# Altium PCB E20XXEDGEPCB_A.PcbDoc
Units mil, origin at the board's own origin, x right, y up, seen from the top; angles counter-clockwise.
Board outline 4250 x 3500 mil, 2 copper layers (Top Layer, Bottom Layer); 25 components, 22 nets, 108 pads, 3 vias.
Unrouted connection lines stored in the file: 2.
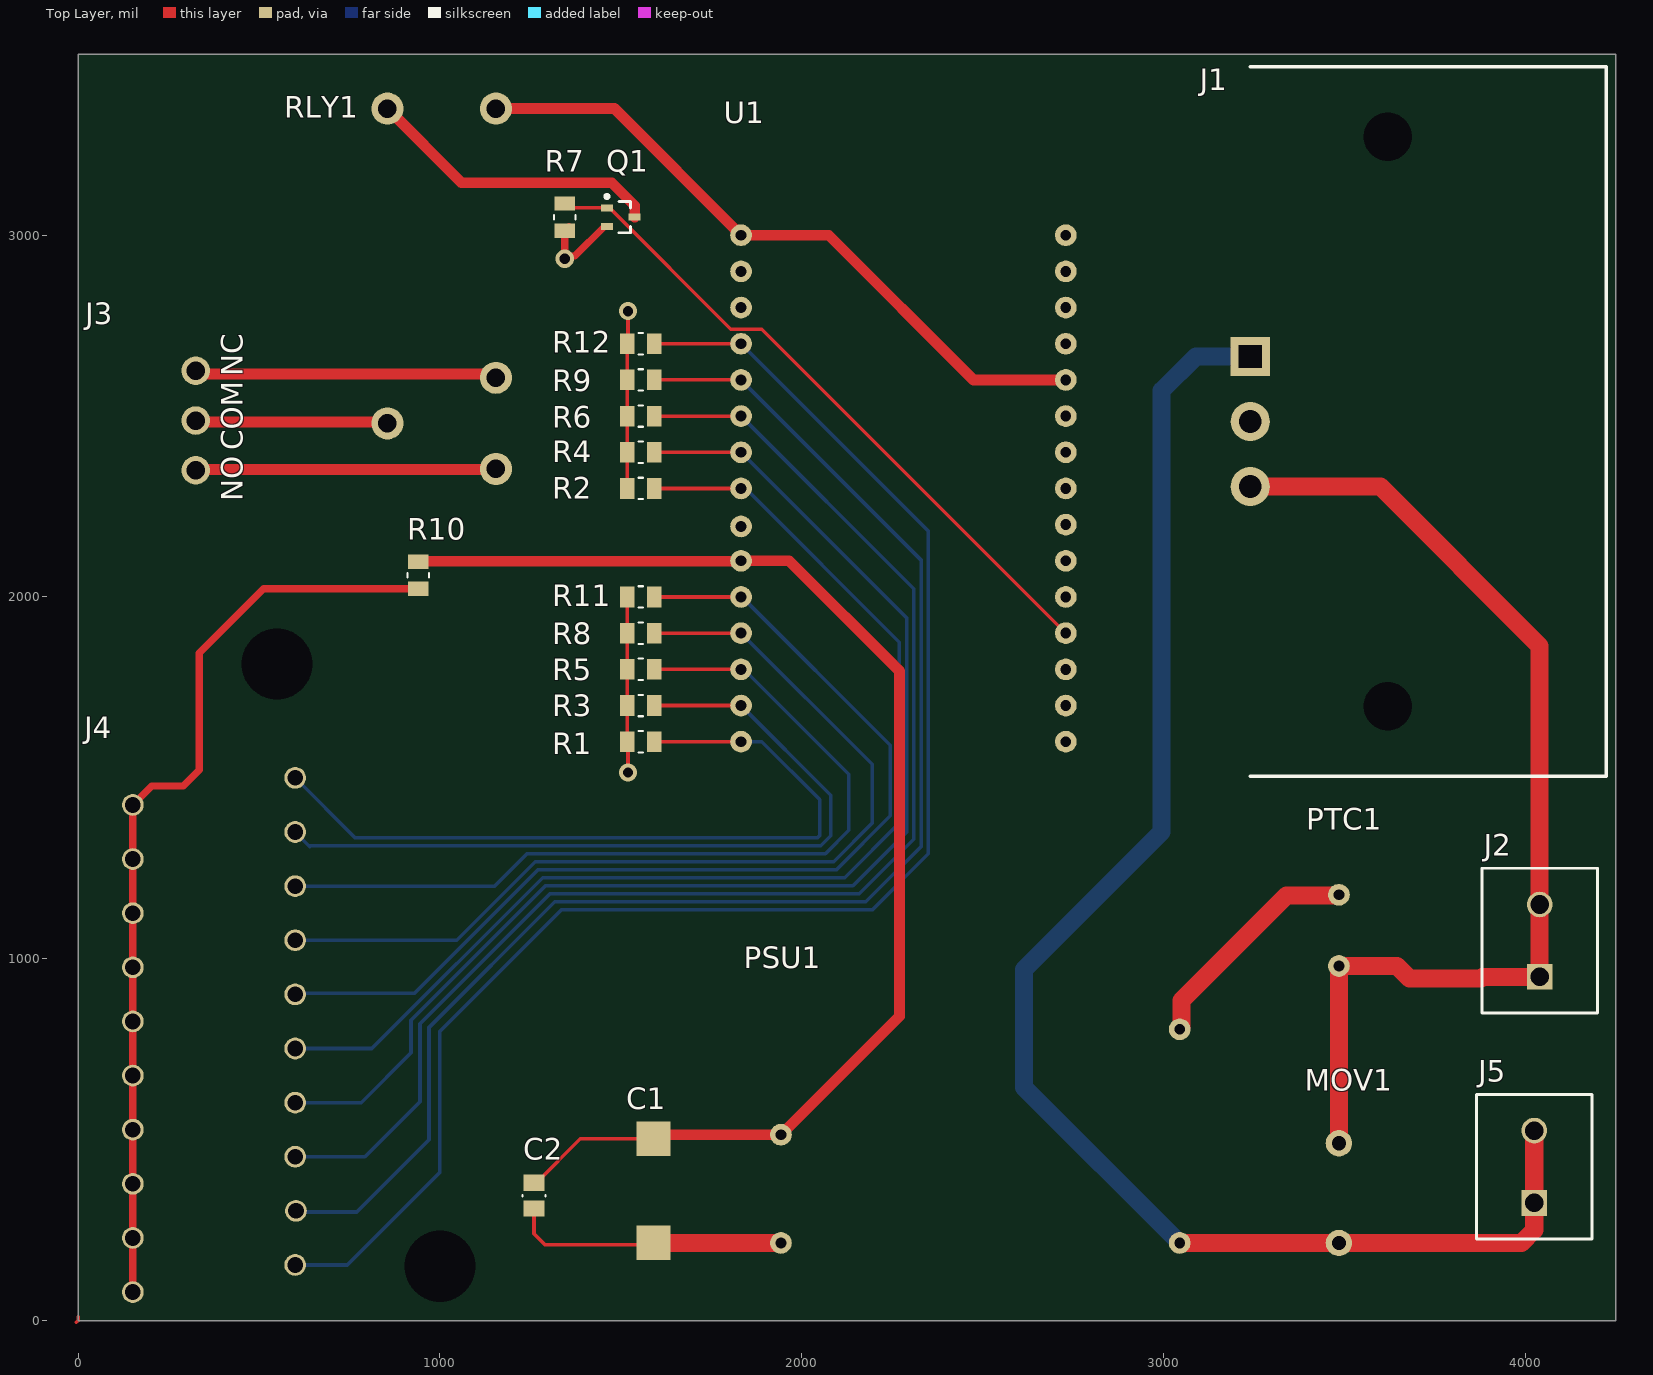
[diagram p0: Top Layer view]
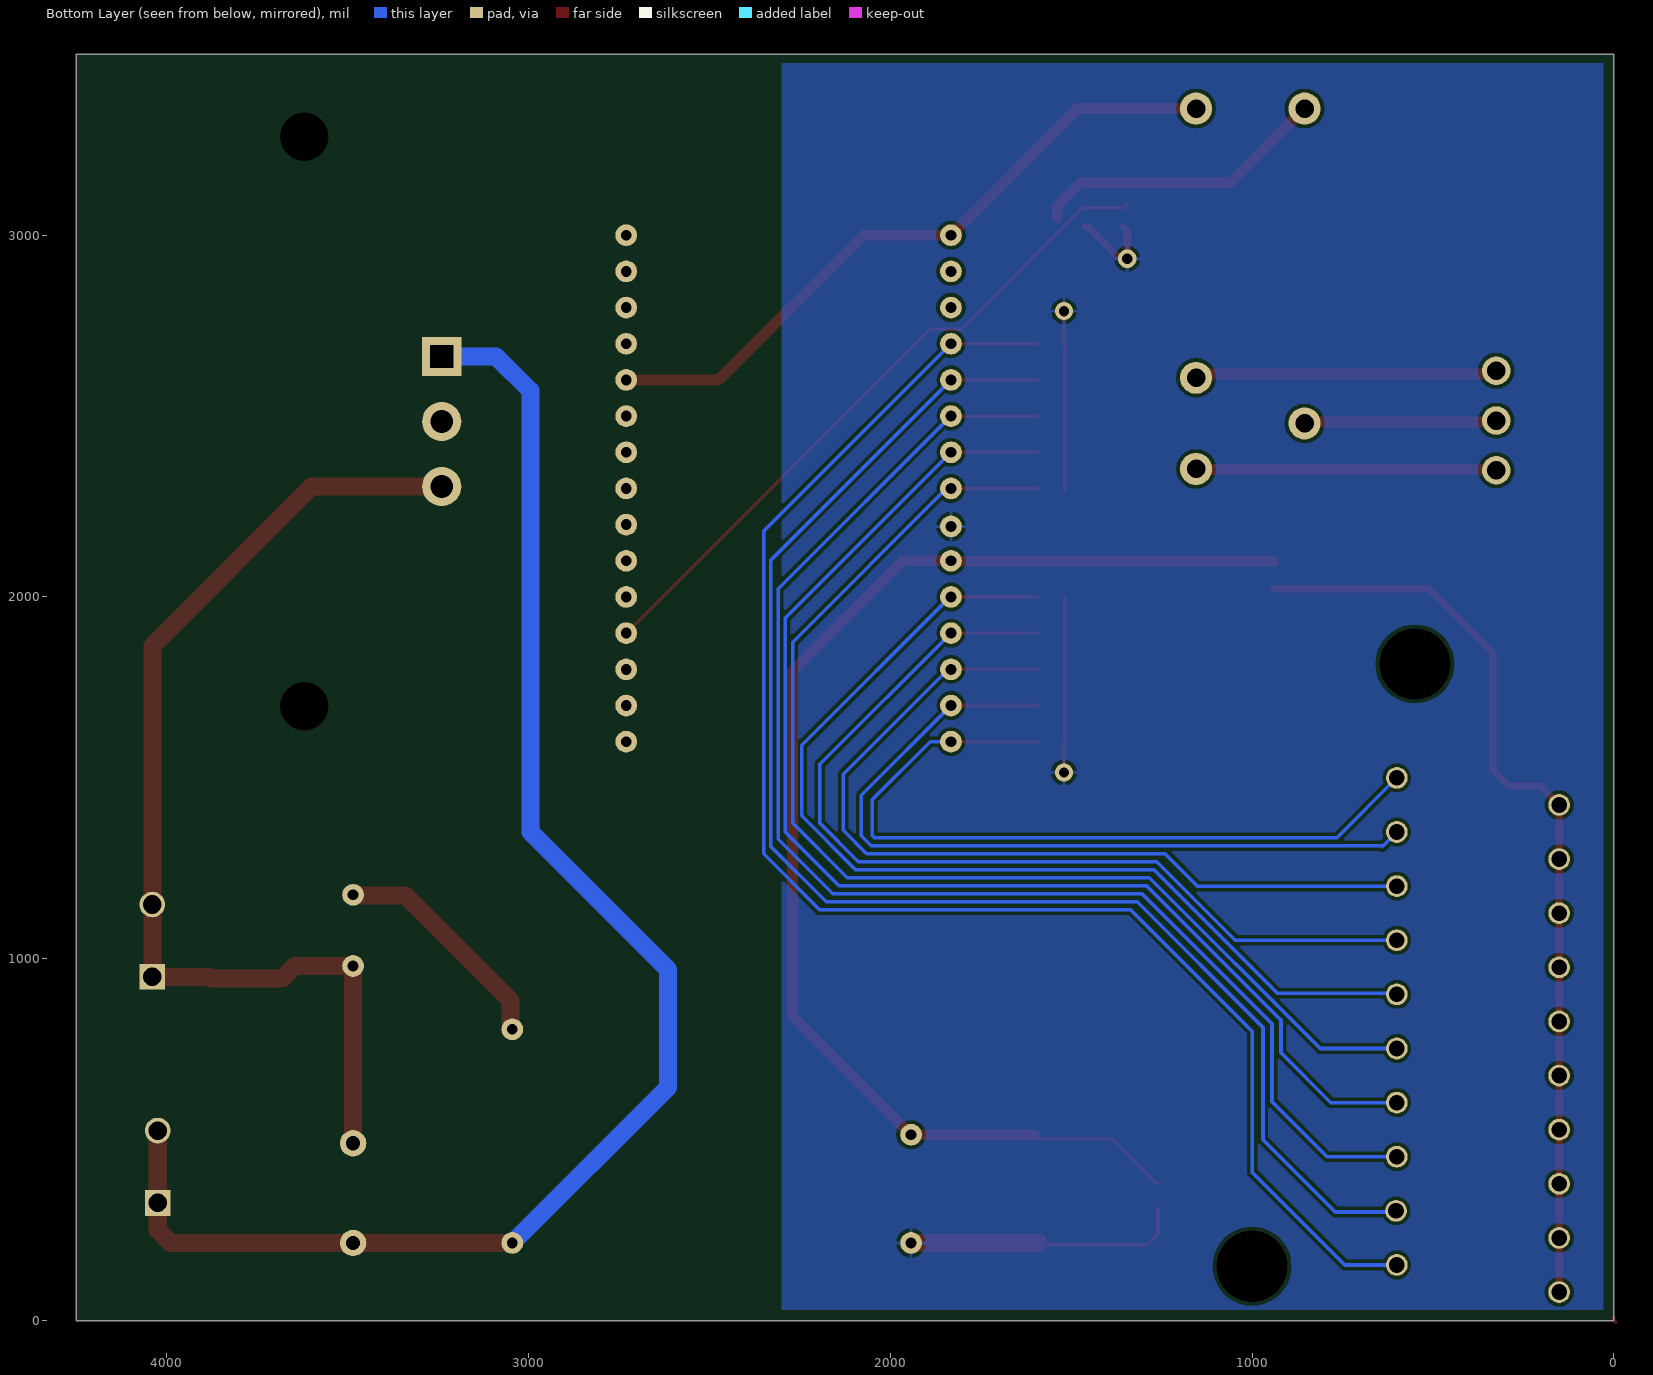
[diagram p1: Bottom Layer view, seen from below]
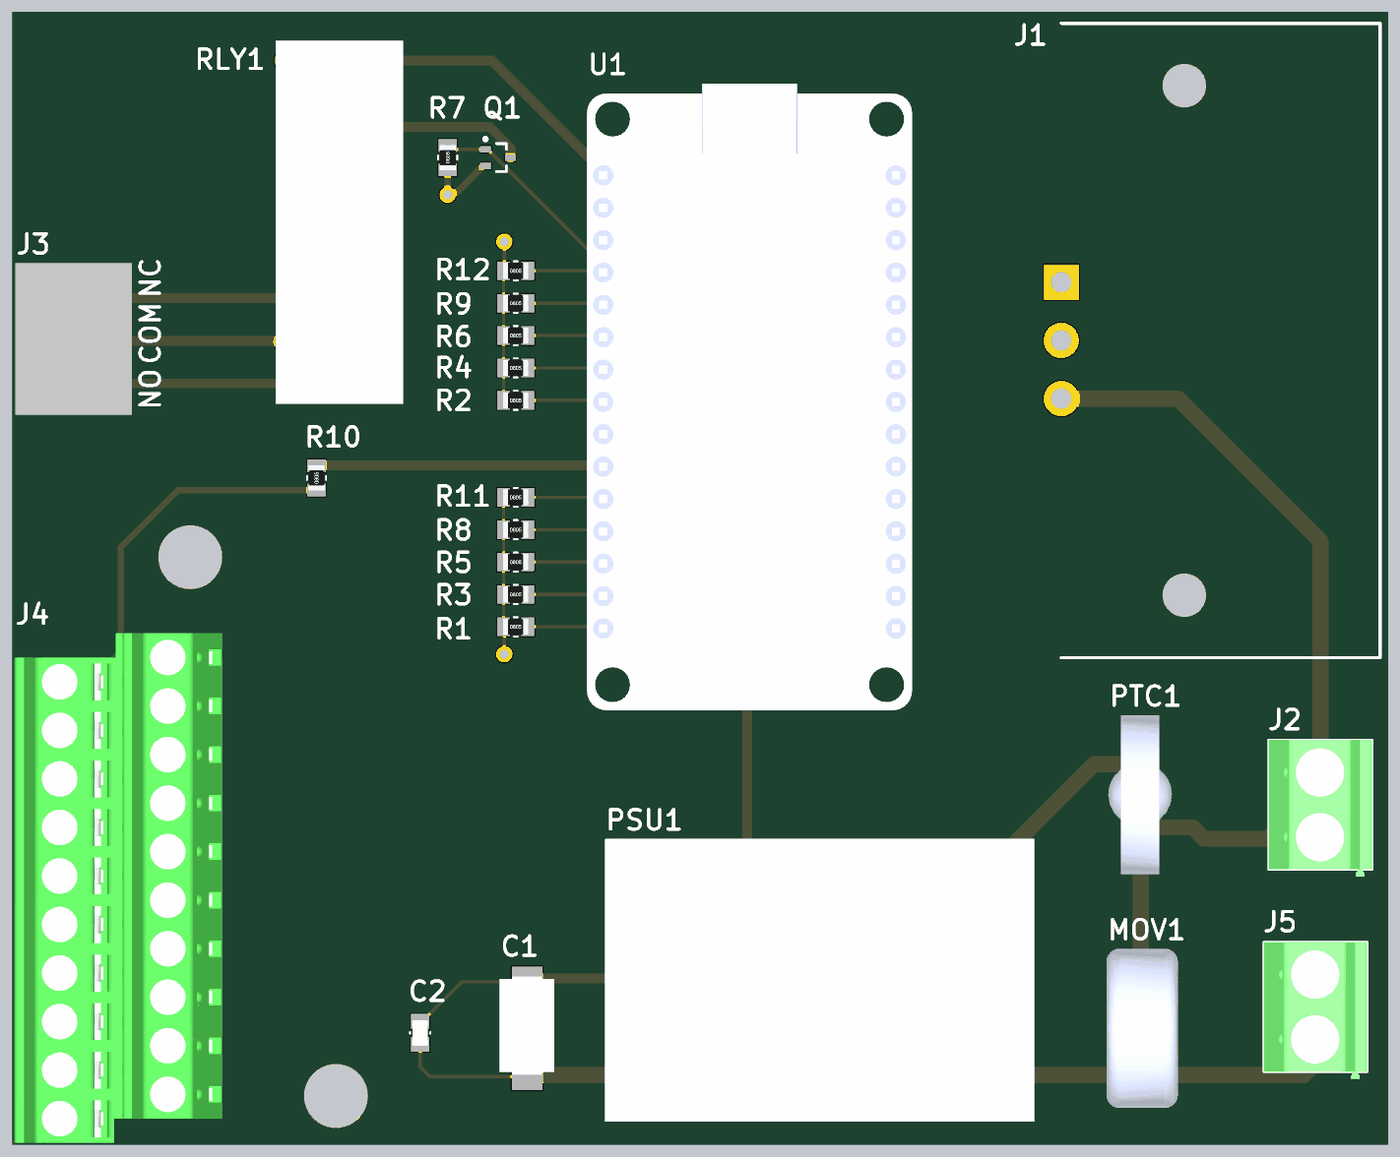
[diagram p2: 3D render of the assembled board from above, using the file's embedded part models]

## Layer stack, top to bottom
Top Solder: solder mask 0.4, Solder Resist, Dk 3.5
Top Layer: signal copper 1.4
Dielectric 1: dielectric 12.6, FR-4, Dk 4.8
Bottom Layer: signal copper 1.4
Bottom Solder: solder mask 0.4, Solder Resist, Dk 3.5

## Board outline
0,0 0,3500 4250,3500 4250,0

## Design rules (kind name [scope] priority, off if disabled: settings)
Clearance Clearance_3 [InNet('NetPSU1_1')] p1: gap=100 ignorepadtopadclearanceinfootprint=FALSE
Clearance Clearance_2 [InNet('NetJ1_3')] p2: gap=100 ignorepadtopadclearanceinfootprint=FALSE
Clearance [InNet('NetJ1_1')] p3: gap=100 ignorepadtopadclearanceinfootprint=FALSE
Clearance Clearance_1 [All] p4: gap=10 ignorepadtopadclearanceinfootprint=FALSE
Creepage [All] p1: checkdistance=10
PolygonConnect [All] p1: connectstyle=Relief reliefconductorwidth=10 reliefentries=4 polygonreliefangle="90 Angle" airgapwidth=10
RoomDefinition Sheet1 [InComponentClass('Sheet1')] p1: confinementstyle=ConfineIn formatcopy=TRUE lockcomponents=FALSE outline 6045,60 14050,60 14050,2110 6045,2110
RoutingVias [All] p1: holewidth=28 width=50 viastyle="Through Hole" minholewidth=28 minwidth=50 maxholewidth=28 maxwidth=50
SolderMaskExpansion [All] p1: expansion=4 istentingtop=FALSE
Width [All] p1: maxlimit=50 minlimit=10 preferedwidth=10
30 further rules are at their usual default settings.

## Components (designator, comment, footprint, x,y, rotation, side; value= is the part's Value field where it differs from the comment)
C1 "47uF" 293D476X0025D2TE3 1590,215 r90 top
C2 "0.1uF" CAPC2012N 1260,345 r270 top
J1 "PX0580/PC" PX0580/PC 3240,2664.92 r270 top
J2 "1729128" PHOE-1729128-2_V 4040,1050 r90 top
J3 "39502-1003" 39502-1003 325,2350 r90 top
J4 "1708110" 1708110 600,1500 r270 top
J5 "1729128" PHOE-1729128-2_V 4025,425 r90 top
MOV1 "V10E275P" V10E275P 3485,490 r270 top
PSU1 "IRM-02-3.3" IRM-02-3.3 3045,214.45 r0 top
PTC1 "B59755B0115A070" B59755B0115A070 3485,980 r90 top
Q1 "BSS138PW,115" NXP-SOT323_M 1500,3050 r0 top
R1 "10K" RESC2012N 1555,1600 r0 top
R2 "10K" RESC2012N 1555,2300 r0 top
R3 "10K" RESC2012N 1555,1700 r0 top
R4 "10K" RESC2012N 1555,2400 r0 top
R5 "10K" RESC2012N 1555,1800 r0 top
R6 "10K" RESC2012N 1555,2500 r0 top
R7 "10K" RESC2012N 1345,3050 r90 top
R8 "10K" RESC2012N 1555,1900 r0 top
R9 "10K" RESC2012N 1555,2600 r0 top
R10 "10K" RESC2012N 940,2060 r90 top
R11 "10K" RESC2012N 1555,2000 r0 top
R12 "10K" RESC2012N 1555,2700 r0 top
RLY1 "G6RL-14-ASI-DC3" G6RL-14-ASI-DC3 855,3350 r90 top
U1 "ESP8266MOD" ESP8266NODEMCU 2730,1600 r180 top

## Footprints (in the part's own frame and the unit in brackets; to place one, negate y for a bottom-side part, rotate by r counter-clockwise, add the part's x,y. Pads: shape width x height; smd on the part's side, far side on the other; paste and mask are expansions set on the pad)
293D476X0025D2TE3 [mm]
  rect 2.4x2.4 smd: 1(0,0) 2(7.3,0)
  body extent 0.01,-2.15 7.75,2.15, height 3.3
39502-1003 [mm]
  round 2 hole 1.3: 1(0,0) 2(3.5,0) 3(7,0)
  body extent -2.41,-1.14 9.5,8, height 6.86
1708110 [mm]
  round 1.524 hole 1.1: 1(0,0) 2(3.8,0) 3(7.6,0) 4(11.4,0) 5(15.2,0) 6(19,0) 7(22.8,0) 8(26.6,0) 9(30.4,0.054) 10(34.2,0) 11(1.9,-11.4) 12(5.7,-11.4) 13(9.5,-11.4) 14(13.3,-11.4) 15(17.1,-11.4) 16(20.9,-11.4) 17(24.7,-11.4) 18(28.5,-11.4) 19(32.3,-11.4) 20(36.1,-11.4)
  body extent -2.03,-15.06 37.98,1.27, height 16.2
B59755B0115A070 [mil] "PTC, 500"
  round 60 hole 30: 1(0,0) 2(196.85,0)
  body extent -145,-97 347,100, height 640
CAPC2012N [mm] "Chip Capacitor, Body 2.0x1.3mm, IPC Med Density"
  rect 1.15x1.45 smd: 1(-0.9,0) 2(0.9,0)
  silkscreen extent -0.05,-0.8 0.05,0.8, body extent -1,-0.62 1,0.63, height 0.78
ESP8266NODEMCU [mil] "NODEMCU ESP8266"
  round 60 hole 30: 1(0,0) 2(0,-100) 3(0,-200) 4(0,-300) 5(0,-400) 6(0,-500) 7(0,-600) 8(0,-700) 9(0,-800) 10(0,-900) 11(0,-1000) 12(0,-1100) 13(0,-1200) 14(0,-1300) 15(0,-1400) 16(897.64,-1400) 17(897.64,-1300) 18(897.64,-1200) 19(897.64,-1100) 20(897.64,-1000) 21(897.64,-900) 22(897.64,-800) 23(897.64,-700) 24(897.64,-595) 25(897.64,-500) 26(897.64,-400) 27(897.64,-300) 28(897.64,-200) 29(897.64,-100) 30(897.64,0)
  body extent -49,-1679 955,258, height 299
G6RL-14-ASI-DC3 [mm]
  round 2.25 hole 1.3: 1(0,0) 2(-22.1,0) 3(-25.3,-7.62) 4(-18.9,-7.62) 5(0,-7.62)
  body extent -26.95,-8.94 1.55,1.06, height 12.3
IRM-02-3.3 [mil] "POWER SUPPLY, 3.3V"
  round 60 hole 30: 1(0,590.55) 2(0,0) 3(-1102.36,0) 4(-1102.36,299.21)
  body extent -1215,-144 112,730, height 591
NXP-SOT323_M [mm] "SOT23, 3-Leads, Body 2.2x1.35mm, Pitch 0.65mm, IPC Low Density"
  rect 0.85x0.5 smd: 1(-0.975,0.65) 2(-0.975,-0.65) 3(0.975,0)
  silkscreen extent -1.1,-1.1 0.67,1.57, body extent -0.67,-1.1 0.67,1.1, height 1.1
PHOE-1729128-2_V [mm] "Receptacle, 2-Leads, Body 8.1x10.16mm, Pitch 5.08mm"
  rect 1.8x1.8 hole 1.3: 1(-2.54,0)
  round 1.8 hole 1.3: 2(2.54,0)
  silkscreen extent -5.08,-4.05 5.08,4.05, body extent -5.65,-4.05 5.08,4.05, height 10.01
PX0580/PC [mm]
  round 2.75 hole 3.4: 0(-15.43,9.65) 0(24.57,9.65)
  rect 2.75x2.75 hole 1.6 square: 1(0,0)
  round 2.75 hole 1.6: 2(4.57,0) 3(9.14,0)
  silkscreen extent -20.33,0 29.47,25
RESC2012N [mm] "Chip Resistor, Body 2.0x1.3mm, IPC Med Density"
  rect 1x1.45 smd: 1(-0.95,0) 2(0.95,0)
  silkscreen extent -0.15,-0.75 0.15,0.75, body extent -1,-0.63 1,0.63, height 0.59
V10E275P [mm]
  round 1.85 hole 1: 1(0,0) 2(7,0)
  body extent -2.92,-2.68 9.58,2.92, height 16.25

## Part data
C1: library part 293D476X0025D2TE3
C2: library part Cap_0.1uF_50V_0805, "CAP CER 0.1UF 50V", Capacitance=100nF, Case Code (Imperial)=0805, Case Code (Metric)=2012, Dielectric=X7R, Dielectric Material=Ceramic, Manufacturer=KEMET, Manufacturer P/N=C0805C104M5RACAUTO, Max Operating Temperature=125°C, Min Operating Temperature=-55°C, Ratings=AEC-Q200, Supplier Part Number 1=399-12977-1-ND, Tolerance=20%, Voltage Rating=50V, Case/Package=0805, Contact Plating=Matte,Tin, Depth=1.25mm, Length=2mm, Mount="Surface Mount", REACH SVHC="No SVHC", Supplier 1=Digi-Key, Termination=Wraparound, Thickness=0.035inch, Voltage Rating (DC)=50V, Width=0.049inch
J1: "PWR ENT RCPT IEC320-C14 PNL SLDR", Color=Black, Current=15A, Current Rating=10A, Flammability Rating="UL94 V-0", Manufacturer=Bulgin, Max Operating Temperature=70°C, Max Voltage Rating (AC)=250V, Min Operating Temperature=-40°C, Package Quantity=100, Supplier Part Number 1=708-1341-ND, Approvals=UL,CSA,VDE,ENEC, Category="Power Connectors", ComponentLink1Description=https://datasheet.ciiva.com/690/in-outlets-2010-690889.pdf?src-supplier=Digi-Key, ComponentLink1URL=https://datasheet.ciiva.com/690/in-outlets-2010-690889.pdf?src-supplier=Digi-Key, ComponentLink2Description=https://datasheet.ciiva.com/8067/308359-8067331.pdf?src-supplier=Element14, ComponentLink2URL=https://datasheet.ciiva.com/8067/308359-8067331.pdf?src-supplier=Element14, ComponentLink3Description=https://datasheet.ciiva.com/11728/0900766b8009b0c7-11728110.pdf?src-supplier=RSComponents, ComponentLink3URL=https://datasheet.ciiva.com/11728/0900766b8009b0c7-11728110.pdf?src-supplier=RSComponents, ComponentLink4Description=https://datasheet.ciiva.com/30218/in-outlets-2010-30218259.pdf?src-supplier=Onlinecomponents.com, ComponentLink4URL=https://datasheet.ciiva.com/30218/in-outlets-2010-30218259.pdf?src-supplier=Onlinecomponents.com, ComponentLink5Description=https://datasheet.ciiva.com/29396/741010-da-01-en-kaltgeraetestecker-px0580-pc-29396341.pdf?src-supplier=Conrad, ComponentLink5URL=https://datasheet.ciiva.com/29396/741010-da-01-en-kaltgeraetestecker-px0580-pc-29396341.pdf?src-supplier=Conrad, ComponentLink6Description=https://datasheet.ciiva.com/14179/rohs-2012-2-eng-cer-14179093.pdf?src-supplier=Distrelec, ComponentLink6URL=https://datasheet.ciiva.com/14179/rohs-2012-2-eng-cer-14179093.pdf?src-supplier=Distrelec, Connector Type=Receptacle,Plug, Contact Material=Brass, Contact Plating=Tin,Nickel, Contact Type=Pin, Depth=30.6mm, Fuse=No, Gender=Male, Housing Material=Nylon, Lead Free="Lead Free", Length=49.8mm, Manufacturer Part Number=PX0580/PC, Max Current Rating=10A, Mount="Through Hole,Panel,Flanges", Number of Contacts=3, Number of Pins=3, Number of Ports=1, Number of Positions=3, Number of Terminals/Pins=3, Orientation="Right Angle", Packaging=Bulk, Panel Thickness=0.126inch, Pricing 1="1=2.85000, 10=2.73600, 25=2.50800, 50=2.39400, 100=2.28000, 250=1.99500, 500=1.93800, 1000=1.65300, 2500=1.53900 (USD)", REACH SVHC="No SVHC", RoHS=Yes, RoHS Compliant=Yes, Series=PX, Stock 1=4203, Supplier 1=Digi-Key, Termination=Solder, Voltage Rating=250V, Voltage Rating (AC)=250V, Voltage Rating (DC)=250V
J2 J5: library part CMP-2000-05815-1, "PCB Terminal Block, 13.5 A, 400 V, 2-Pin THD, RoHS, Bulk", Current Rating=13500mA, Manufacturer="Phoenix Contact", Package Description="2-Pin Through Hole Device, Body 8.1 x 10.16 mm, Pitch 5.08 mm", Package Reference=1729128-2, Package Version=03/2015, Voltage Rating=400V, Datasheet URL=https://datasheet.ciiva.com/16046/1729128-16046181.pdf, Datasheet Version=12/2013, Manufacturer URL=http://www.phoenixcontact.com/, Mounting Technology=ThroughHole, No. of Positions=2, No. of Rows=1, Orientation=Horizontal, Package URL=https://www.phoenixcontact.com/online/portal/pi/pxc/product_detail_page/!ut/p/b1/3VdJjqNKFDxLH8AFycySyWY2ozFsEPOMMQaDOX1XedGL_1Vdm5YXJleknhSKeBkvI6EA8ncAo3AYoDhBQGco6KN7VURTdemj9us_IEKEZo_YHiPAEWEFmDGOHMORkqKYCORBZxgL7ZoaZYcbFFUZ3fqxSY6GOuxydWUuHqz1ynmMFygu583Bob0Ewr6Sd_l-5m-kAueHiB0jpRwZwe58wwtkpxtMYd_LmGcDRU02dRNEyWt6Y2ti5pSyJ_reIkzIulrqApdnbT11V5jnCKbYNCvhEM1MCpPByat_X379-iThf08CI5GfOPqfBeS3BRoBOdD55AKVv0iLwCMq-2BrzXWSGRH7pUGD9uwXQjiph3xL0DKQwdGa0JImiIOmBNOestqgwTHSSs2oOep-78apyXQBvNi8ZLaFjvjWvcaUEBu0MC6Wbe-d6mB0FAebo2lUWinqYaZs5DAYzV0RP9yitUjnGJ0iI9xhZkT42OCQNUJJhkgWINNQLP2JFP6OpMg3JCVg70jqHT0lvKOnhHf0lPuOnnLf0VPuWx6_dxwUIvwk5WMkT0kLL1mh61l2yZVSzG3pYV_bqo-mj6uMKwKwdnnW8Jh5RTOJzMOA5c-eJDaZQw4mTMPH02PvS_ZAqNVjVTo2WyYLkwH_KU1mmmG5kjRhDqPXLwwVHvVOjCM60-fpXvTDfMGW1PVFVS1r4e4yVDk4ZdNbkUHvqPqQSeian4UD39fNKmachqdJ1NJbyk8rXT9mXTvPk3oE5meulKGgiruPJek-4I9hTT6G8ZLOyRSm2RRVbThERQad5OS28hdt4YW4vG0stgYYzsWsK4_7y6DZMjJSCqri1kyiZR5vD7pwIrNR7QwPHTcLTI5qT7eRlpHrdGiupYlqQDJ7zy_CND8fWWBoLRXxk1RVcXiBQwbTD4Xi7KL-FuO94t9xaqweXzH, Packing=Bulk, PartNumber=1729128, Pitch=5.08mm, RoHS=TRUE
J3: "TERM BLOCK HDR 3POS 90DEG 3.5MM", Color=Black, Contact Resistance=8mR, Current=8A, Flammability Rating="UL94 V-0", Manufacturer=Molex, Manufacturer Part Number=0395021003, Max Operating Temperature=105°C, Min Operating Temperature=-40°C, Package Quantity=1280, Supplier Part Number 1=WM7771-ND, Voltage=300V, Category="Headers and Wire Housings", ComponentLink1Description=http://www.onlinecomponents.com/datasheet/395021003.aspx?p=17943918&src-supplier=Onlinecomponents.com, ComponentLink1URL=http://www.onlinecomponents.com/datasheet/395021003.aspx?p=17943918&src-supplier=Onlinecomponents.com, ComponentLink2Description=http://components.arrow.com/part/dataview/0323_01936340?src-supplier=Arrow+Europe, ComponentLink2URL=http://components.arrow.com/part/dataview/0323_01936340?src-supplier=Arrow+Europe, ComponentLink3Description=http://www.molex.com/webdocs/datasheets/pdf/en-us/0395021003_TERMINAL_BLOCKS.pdf?src-supplier=Avnet, ComponentLink3URL=http://www.molex.com/webdocs/datasheets/pdf/en-us/0395021003_TERMINAL_BLOCKS.pdf?src-supplier=Avnet, ComponentLink4Description=https://www.molex.com/pdm_docs/sd/395021002_sd.pdf?src-supplier=Digi-Key, ComponentLink4URL=https://www.molex.com/pdm_docs/sd/395021002_sd.pdf?src-supplier=Digi-Key, ComponentLink5Description=http://components.arrow.com/part/dataview/44158187S8420486N3303?src-supplier=Arrow+Electronics, ComponentLink5URL=http://components.arrow.com/part/dataview/44158187S8420486N3303?src-supplier=Arrow+Electronics, Contact Material=Brass, Contact Plating=Tin, Current Rating=8A, Depth=9.2mm, ELV=Compliant, Halogen Free="Low Halogen", Housing Color=Black, Housing Material=Polyamide, Lead Free="Lead Free", Length=11.89mm, Mount="Through Hole", Number Of Circuits=3, Number of Contacts=3, Number of Levels=1, Number of Positions=3, Number of Positions Per Level=3, Number of Rows=1, Orientation="Right Angle", Packaging=Bulk, Pitch=3.5mm, Pricing 1="1=0.78000, 10=0.64800, 100=0.54000, 1000=0.43200, 5000=0.37800, 10000=0.35910 (USD)", REACH SVHC="No SVHC", RoHS=Yes, RoHS Compliant=Yes, Series="Eurostyle™ ESE 39502", Stock 1=1366, Supplier 1=Digi-Key, Termination=Solder, Voltage Rating=300V, Width=9.2mm
Q1: library part CMP-1259-00109-1, "N-Channel Trench MOSFET, 60 V, 0.32 A, -55 to 150 degC, 3-Pin SOT323, Tape and Reel", Manufacturer="NXP Semiconductors", Automotive Qualified=Y, Channel Type=N, Code_JEITA=SC-70, ComponentLink1Description="Manufacturer URL", ComponentLink1URL=http://www.nxp.com/, ComponentLink2Description=Datasheet, ComponentLink2URL=http://www.nxp.com/documents/data_sheet/BSS138PW.pdf, ComponentLink3Description="Package Specification", ComponentLink3URL=http://www.nxp.com/documents/outline_drawing/sot323_po.pdf, DatasheetVersion="Rev. 1", ID [max] (A)=0.32, IDM [max] (A)=1.2, Mounting Technology="Surface Mount", PackageDescription="3-Pin Small Outline Transistor Package, Body 2 x 1.25 mm, Pitch 0.65 mm", PackageReference=SOT323, PackageVersion="06-03-16, 03/2006", Packing="Tape & Reel", PartNumber=BSS138PW,115, VDS [max] (V)=60, VGSth [typ] (V)=1.2
R1 R2 R3 R4 R5 R6 R7 R8 R9 R10 R11 R12: library part Res_10K_0805, "RES 10K OHM 1/8W 1% 0805", Case Code (Imperial)=0805, Case Code (Metric)=2012, Manufacturer=Vishay, Manufacturer P/N=CRCW080510K0FKEA, Max Operating Temperature=155°C, Min Operating Temperature=-55°C, Package Quantity=5000, Power Rating=125mW, Resistance=10kR, Supplier Part Number 1=541-10.0KCCT-ND, Temperature Coefficient=100ppm/°C, Tolerance=1%, Voltage Rating=150V, Case/Package=0805, ComponentLink4Description=http://www.vishay.com/docs/20035/dcrcwe3.pdf, ComponentLink4URL=http://www.vishay.com/docs/20035/dcrcwe3.pdf, Composition="Thick Film", Contact Plating=Tin, Depth=1.25mm, Height=0.45mm, Lead Free="Lead Free", Length=2mm, Military Standard=Not, Radiation Hardening=No, REACH SVHC=Unknown, Supplier 1=Digi-Key, Termination=SMD/SMT, Voltage Rating (DC)=150V, Weight=0.000194oz, Width=1.25mm

## Free pads (board coordinates)
  round 0 hole 196.85: 0(550,1815) 0(1000,150)

## Via types
v1: diameter 50, hole 28, Top Layer to Bottom Layer, 3 vias

## Nets (pads, with @x,y where several pads share a name; then routed paths per layer and width w, separated by ;. In a path a pad name is that pad's centre, name@x,y a point inside that pad or via, vN(x,y) a via of type N, cw(c..) or ccw(c..) an arc to the next point about the centre after c; other vN are vias at no path point)
GND: C1.1 C2.2 PSU1.3 Q1.2 R1.1 R2.1 R3.1 R4.1 R5.1 R6.1 R7.1 R8.1 R9.1 R11.1 R12.1 U1.14 U1.24 | length 1987.9
  Top Layer w10: C2.2 1260,240 1290,210 1585,210 C1.1 C1.1@1590.55,214.45 ; R11.1 R8.1 R5.1 R3.1 R1.1 1520,1597.6 v1(1520,1515) ; R2.1@1517.6,2294 R2.1 R4.1 R6.1 R9.1 R12.1@1517.6,2690 ; R12.1 1520,2702.4 v1(1520,2790)
  Top Layer w20: R7.1@1356.81,3024.41 R7.1 v1(1345,2935) 1352.65,2942.65 1372.97,2942.65 1454.72,3024.41 Q1.2
  Top Layer w50: C1.1@1590.55,214.45 PSU1.3
GND_HOUS: J1.2
NetJ1_1: J1.1 J5.1 J5.2 MOV1.2 PSU1.2 | length 4245.1
  Top Layer w50: PSU1.2 MOV1.2 ; MOV1.2 3989.41,214.41 4025,250 J5.1 J5.2
  Bottom Layer w50: PSU1.2 2615,644.45 2615,970 2995,1350 2995,2570 3089.92,2664.92 J1.1
NetJ1_3: J1.3 J2.1 J2.2 MOV1.1 PTC1.1 | length 2958.9
  Top Layer w50: J1.3 3599.92,2305.08 4040,1865 J2.2 J2.1 3882.5,950 3877.5,945 3680,945 3645,980 PTC1.1 MOV1.1
NetJ3_1: J3.1 RLY1.3 | length 831.6
  Top Layer w10: J3.1 J3.1@326.97,2351.97 ; RLY1.3@1153.03,2351.97 RLY1.3
  Top Layer w30: J3.1@326.97,2351.97 RLY1.3@1153.03,2351.97
NetJ3_2: J3.2 RLY1.2 | length 533.3
  Top Layer w30: J3.2 328.94,2483.86 851.06,2483.86 RLY1.2
NetJ3_3: J3.3 RLY1.4 | length 838.2
  Top Layer w30: J3.3 334.33,2616.26 1144.64,2616.26 RLY1.4
NetJ4_1: J4.1 R1.2 U1.30 | length 2143.8
  Top Layer w10: R1.2 U1.30
  Bottom Layer w10: J4.1 765,1335 2044.14,1335 2050,1340.86 2050,1440 1890,1600 U1.30
NetJ4_2: J4.2 R3.2 U1.29 | length 2210.5
  Top Layer w10: R3.2 U1.29
  Bottom Layer w10: J4.2 640.39,1310 ; 640.39,1312.78 2052.78,1312.78 2080,1340 2080,1452.36 U1.29
NetJ4_3: J4.3 R5.2 U1.28 | length 2406.6
  Top Layer w10: R5.2 U1.28
  Bottom Layer w10: J4.3 1150.79,1200.79 1240.56,1290.56 2065.56,1290.56 2130,1355 2130,1510 1840,1800 U1.28
NetJ4_4: J4.4 R8.2 U1.27 | length 2644.3
  Top Layer w10: R8.2 U1.27
  Bottom Layer w10: J4.4 1046.18,1051.18 1263.33,1268.33 2088.33,1268.33 2195,1375 2195,1537.36 U1.27
NetJ4_5: J4.5 R11.2 U1.26 | length 2866.8
  Top Layer w10: R11.2 U1.26
  Bottom Layer w10: J4.5 603.43,905 930,905 1271.11,1246.11 2096.11,1246.11 2245,1395 2245,1590 1835,2000 U1.26
NetJ4_6: J4.6 R2.2 U1.23 | length 3281.7
  Top Layer w10: R2.2 U1.23
  Bottom Layer w10: J4.6 811.97,751.97 1283.89,1223.89 2118.89,1223.89 2270,1375 2270,1875 1845,2300 U1.23
NetJ4_7: J4.7 R4.2 U1.22 | length 3531.9
  Top Layer w10: R4.2 U1.22
  Bottom Layer w10: J4.7 782.36,602.36 920,740 920,830 1291.67,1201.67 2141.67,1201.67 2290,1350 2290,1942.36 U1.22
NetJ4_8: J4.8 R6.2 U1.21 | length 3807.1
  Top Layer w10: R6.2 U1.21
  Bottom Layer w10: J4.8 792.76,452.76 945,605 945,820 1304.44,1179.44 2159.44,1179.44 2310,1330 2310,2022.36 U1.21
NetJ4_9: J4.9 R9.2 U1.20 | length 4065.2
  Top Layer w10: R9.2 U1.20
  Bottom Layer w10: J4.9 605.28,300 770,300 970,500 970,810 1317.22,1157.22 2177.22,1157.22 2330,1310 2330,2102.36 U1.20
NetJ4_10: J4.10 R12.2 U1.19 | length 4313.6
  Top Layer w10: R12.2 U1.19
  Bottom Layer w10: J4.10 743.54,153.54 1000,410 1000,800 1335,1135 2195,1135 2350,1290 2350,2182.36 U1.19
NetJ4_11: J4.11 J4.12 J4.13 J4.14 J4.15 J4.16 J4.17 J4.18 J4.19 J4.20 R10.1 | length 2572.1
  Top Layer w20: J4.20 J4.19 J4.18 J4.17 J4.16 J4.15 J4.14 J4.13 J4.12 J4.11 203.27,1477.28 290.57,1477.28 335,1521.72 335,1845 512.6,2022.6 R10.1
NetPSU1_1: PSU1.1 PTC1.2 | length 638
  Top Layer w50: PSU1.1 3045,807.71 3050,812.71 3050,885 3340,1175 3483.15,1175 PTC1.2
NetQ1_1: Q1.1 R7.2 U1.4 | length 1876.8
  Top Layer w10: R7.2 1356.81,3075.59 Q1.1 1468.5,3075.59 1804.09,2740 1890,2740 U1.4
NetQ1_3: Q1.3 RLY1.1 | length 826.2
  Top Layer w30: RLY1.1 1060,3145 1475,3145 1538.39,3081.61 Q1.3
VCC: C1.2 C2.1 PSU1.4 R10.2 RLY1.5 U1.11 U1.16 U1.25 | length 5497.8
  Top Layer w10: C2.1 1265.91,380.43 1387.87,502.4 C1.2 C1.2@1601.26,513.66
  Top Layer w30: R10.2 941.3,2098.7 1831.06,2098.7 U1.25 1965,2100 2270,1795 2270,841.02 PSU1.4 C1.2@1601.26,513.66 ; RLY1.5 1482.36,3350 U1.16 2075,3000 2475,2600 U1.11
pads on no net: J1.0 U1.1 U1.2 U1.3 U1.5 U1.6 U1.7 U1.8 U1.9 U1.10 U1.12 U1.13 U1.15 U1.17 U1.18
copper on no net: | length 17.1
  Top Layer w10: -5,-5 0,0 0,10

## Polygon pours and split planes (outlines as drawn)
GND on Bottom Layer "GND_L02_P000" (solid, pour order 0): 30,3475 2300,3475 2300,30 30,30

## Silkscreen, mask and mechanical layers (free items; w line width, h text height)
Mechanical 1:
  the board outline again, w5

## Text inside footprints (layer, text, board x,y; h text height)
J3: Top Overlay "NC" at 455,2610 h60 r90; Top Overlay "COM" at 455,2405 h60 r90; Top Overlay "NO" at 455,2265 h60 r90